# Altium PCB PCB_Connector_Board_4_2021-09-09.pcbdoc
Units mm, origin at the board's own origin, x right, y up, seen from the top; angles counter-clockwise.
Board outline 102.74 x 64.99 mm, 2 copper layers (Top Layer, Bottom Layer); 12 components, 22 nets, 47 pads, 8 vias.
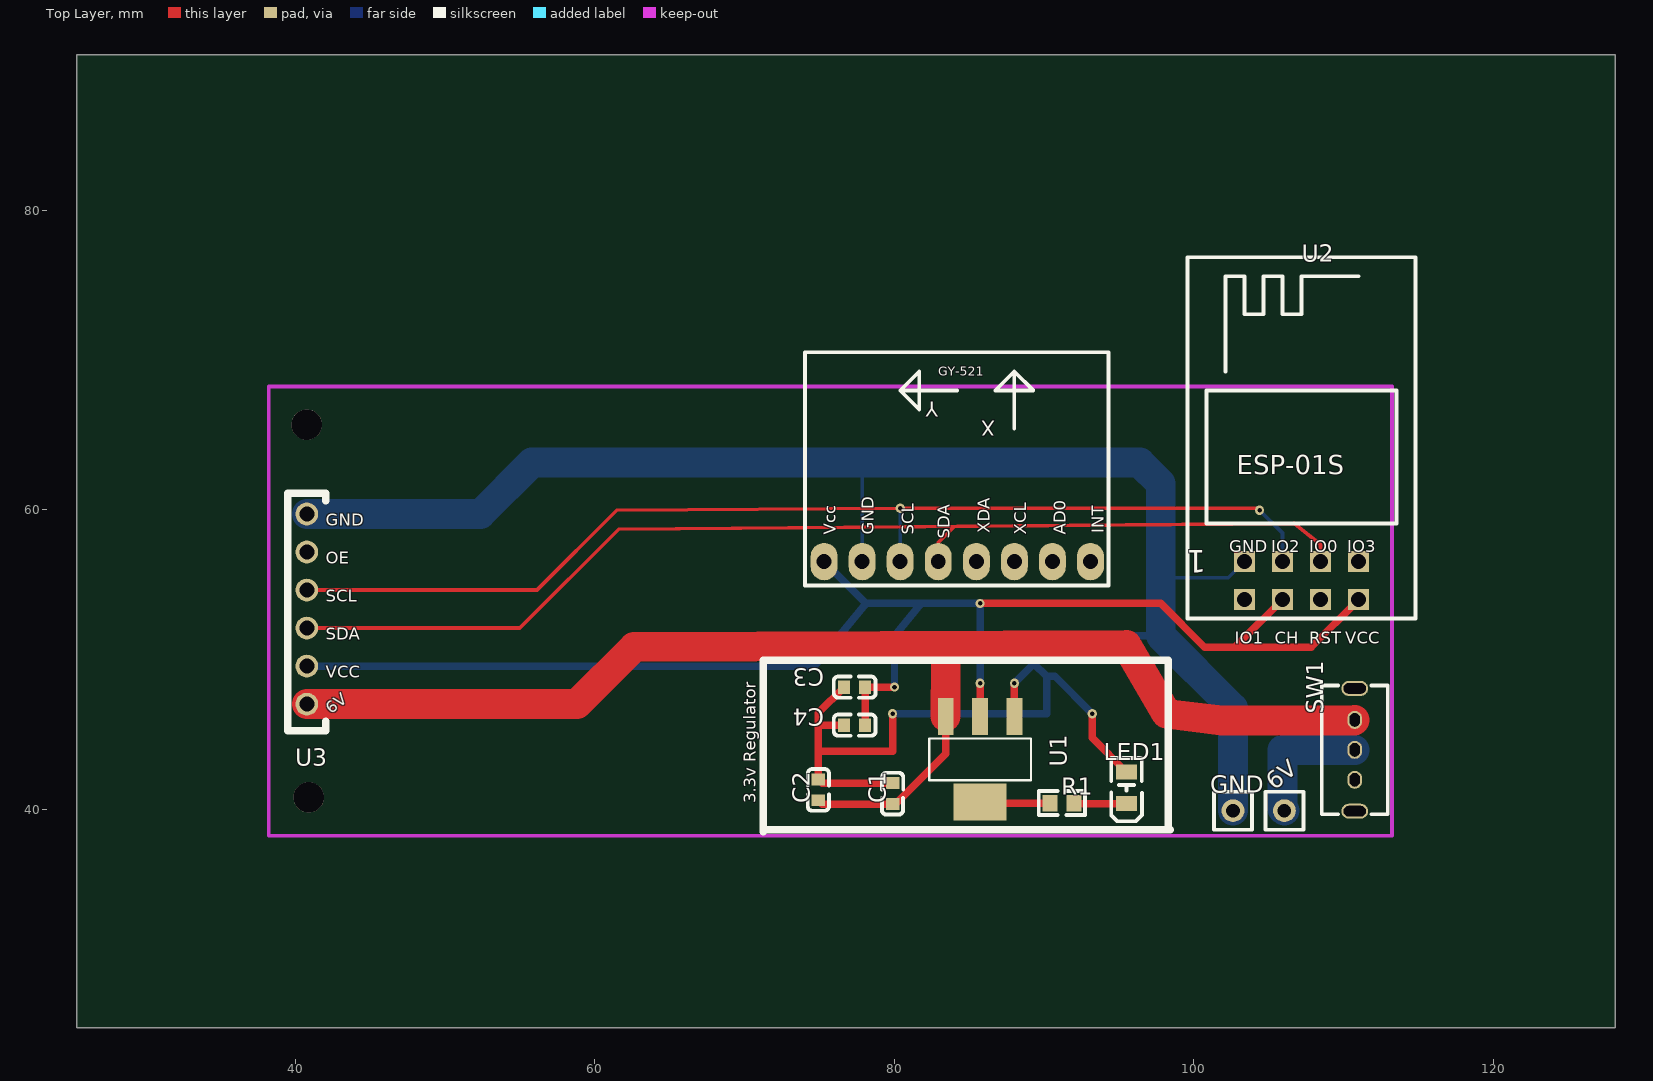
[diagram p0: Top Layer view]
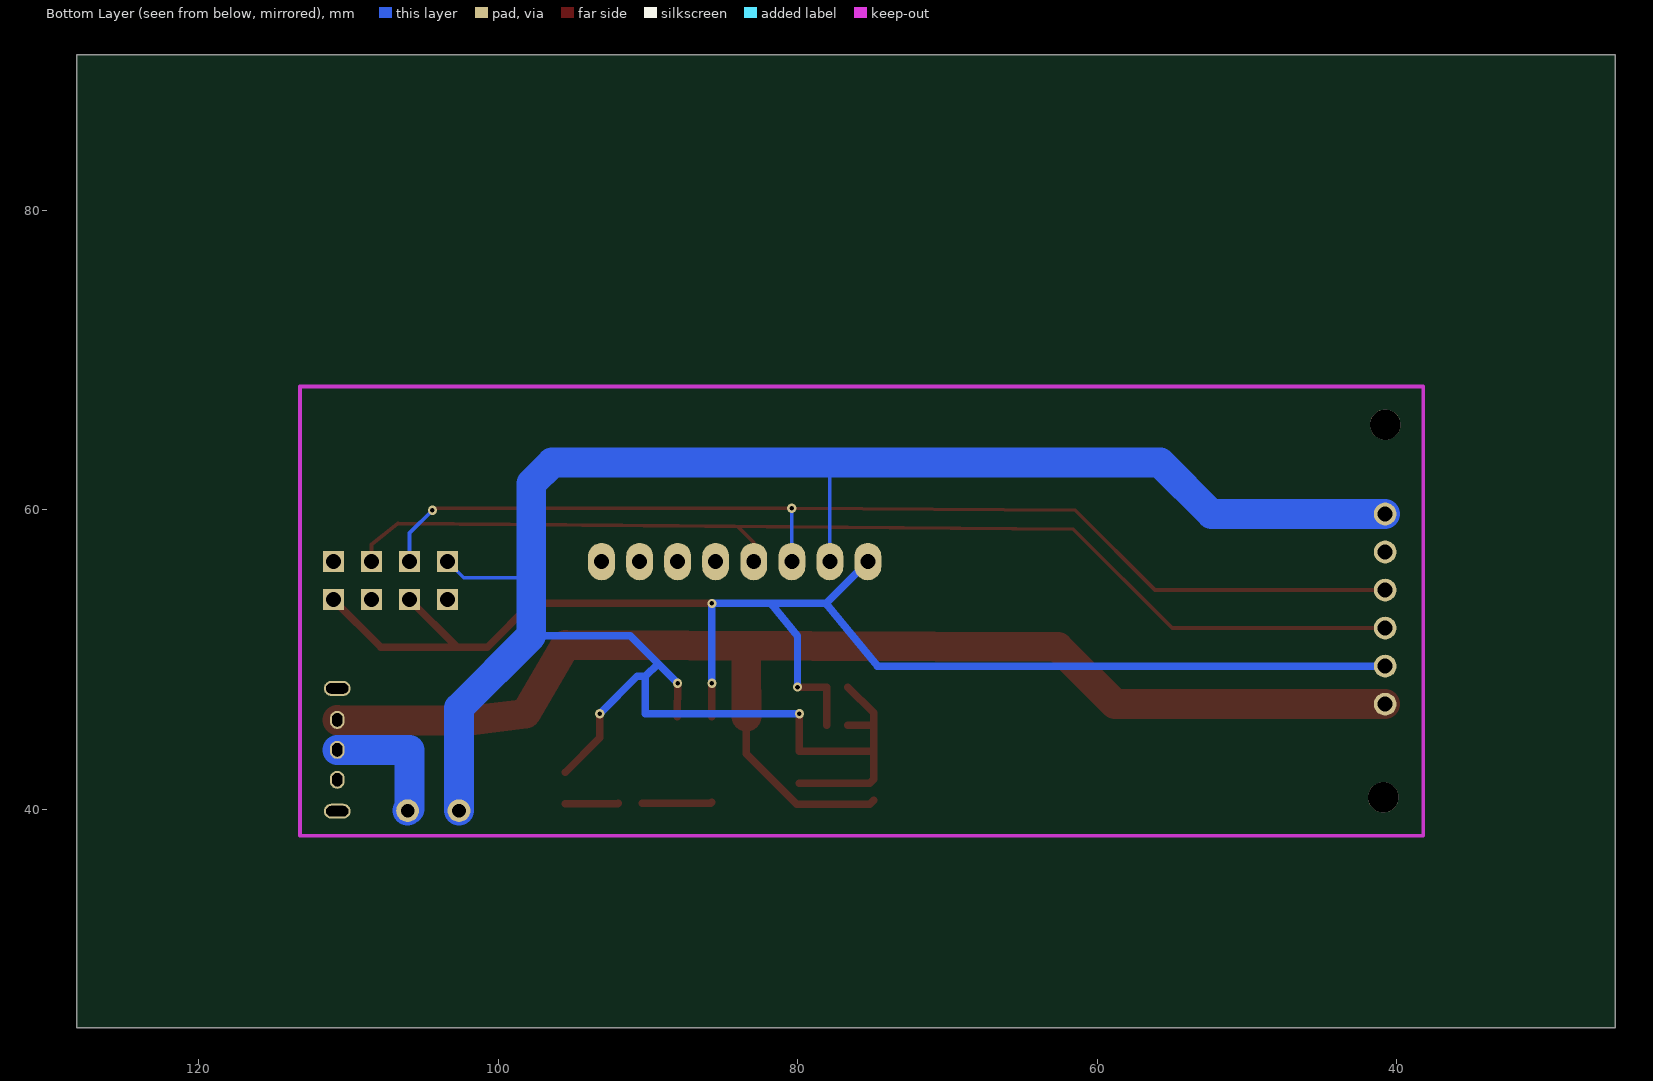
[diagram p1: Bottom Layer view, seen from below]

## Layer stack, top to bottom
Top Layer: signal copper (thickness not stored)
Dielectric: dielectric 0.32, FR-4, Dk 4.8
Bottom Layer: signal copper (thickness not stored)

## Board outline
128.143,25.4 25.4,25.4 25.4,90.388 128.143,90.388

## Components (designator, comment, footprint, x,y, rotation, side; value= is the part's Value field where it differs from the comment)
6V "6V Header" "SINGLE PIN HEADER" 106.045,39.906 r0 top
C1 "100u" C0603 79.883,41.049 r90 top
C2 "22u" C0603 74.93,41.303 r90 top
C3 "100u" C0603 77.343,48.161 r180 top
C4 "22u" C0603 77.343,45.621 r180 top
GND "GND Header" "SINGLE PIN HEADER" 102.616,39.906 r0 top
LED1 "LED0805-R-RD" LED0805-R-RD 95.504,41.43 r90 top
R1 "R0603" R0603 91.186,40.414 r0 top
SW1 "SK-12D02-VG5" SW-TH_SK-12D02VG3 110.744,43.97 r90 top
U1 "AMS1117-3.3_C165482" SOT-223_L6.5-W3.5-P2.30-LS7.0-BR 85.725,43.335 r90 top
U2 "ESP-01S" ESP-01S 107.188,55.273 r0 top
U3 "Header PWM Board" "6 PIN HEADER" 40.767,47.018 r90 top

## Footprints (in the part's own frame and the unit in brackets; to place one, negate y for a bottom-side part, rotate by r counter-clockwise, add the part's x,y. Pads: shape width x height; smd on the part's side, far side on the other; paste and mask are expansions set on the pad)
"6 PIN HEADER" [mil]
  round 60 hole 39.37: 1(0,0) 2(100,0) 3(200,0) 4(300,0) 5(400,0) 6(500,0)
C0603 [mm]
  rect 0.8x0.9 smd: 1(-0.7,0) 2(0.7,0)
  silkscreen extent -1.41,-0.71 1.39,0.72
ESP-01S [mm]
  rect 1.4x1.4 hole 1: 1(-3.81,1.27) 2(-1.27,1.27) 3(1.27,1.27) 4(3.81,1.27) 5(3.81,-1.27) 6(1.27,-1.27) 7(-1.27,-1.27) 8(-3.81,-1.27)
  silkscreen extent -7.62,-2.54 7.62,21.59
LED0805-R-RD [mm]
  rect 1x1.4 smd: 1(1.05,0) 2(-1.05,0)
  silkscreen extent -2.22,-1.04 1.99,1.01
R0603 [mm]
  rect 1x1.1 smd: 1(-0.8,0) 2(0.8,0)
  silkscreen extent -1.55,-0.8 1.55,0.81
"SINGLE PIN HEADER" [mil]
  round 60 hole 36: 1(0,0)
  silkscreen extent -50,-50 50,50
SOT-223_L6.5-W3.5-P2.30-LS7.0-BR [mm]
  rect 2.465x1.05 smd: 1(2.857,-2.3) 2(2.857,0) 3(2.857,2.3)
  rect 2.465x3.54 smd: 4(-2.857,0)
  silkscreen extent -1.4,-3.4 1.4,3.4
SW-TH_SK-12D02VG3 [mm]
  oval 1.2x1 hole 0.7 slot 0.9 at 0 deg: 1(-2,0) 2(0,0) 3(2,0)
  oval 1x1.8 hole 0.7 slot 1.5 at 90 deg: 4(4.1,0) 5(-4.1,0)
  silkscreen extent -4.3,-2.2 4.3,2.2

## Free pads (board coordinates)
  oval 1.8x2.5 hole 1: 1(75.311,56.543) 2(77.851,56.543) 3(80.391,56.543) 4(82.931,56.543) 5(85.471,56.543) 6(88.011,56.543) 7(90.551,56.543) 8(93.091,56.543)
  round 2.032 hole 2.032 unplated: ""(40.767,65.687) ""(40.894,40.795)

## Via types
v1: diameter 0.61, hole 0.305, Top Layer to Bottom Layer, 8 vias

## Nets (pads, with @x,y where several pads share a name; then routed paths per layer and width w, separated by ;. In a path a pad name is that pad's centre, name@x,y a point inside that pad or via, vN(x,y) a via of type N, cw(c..) or ccw(c..) an arc to the next point about the centre after c; other vN are vias at no path point)
N$3546: LED1.2 R1.2 | length 3.5
  Top Layer w0.5: R1.2 92.02,40.38 LED1.2
S$706: 
S$708: 
S$3600: 
SW1_1: SW1.1
SW1_2: 6V.1 SW1.2 | length 8.9
  Bottom Layer w2: 6V.1 105.918,40.033 105.918,43.97 SW1.2
SW1_4: SW1.4
SW1_5: SW1.5
U1_1: C1.2 C2.2 C3.2 C4.2 GND.1 LED1.1 pad.2 U1.1 U2.1 U3.6 | length 152.7
  Top Layer w0.5: 74.93,43.83 74.966,43.867 79.883,43.867 v1(79.883,46.383) ; 74.93,45.626 C4.2 ; C3.2 74.93,46.448 C2.2 75.184,41.749 C1.2 ; v1(88.011,48.415) U1.1 ; v1(93.218,46.383) 93.218,44.766 LED1.1
  Bottom Layer w0.254: pad.2 77.851,63.02 ; 97.79,55.461 102.296,55.461 U2.1
  Bottom Layer w0.5: v1(79.883,46.383) 90.17,46.383 90.17,48.875 ; v1(88.011,48.415) 91.186,51.59 97.79,51.59 ; 89.321,49.725 90.17,48.875 ; v1(93.218,46.383) 90.726,48.875 90.17,48.875
  Bottom Layer w2: U3.6 52.36,59.718 55.789,63.147 96.393,63.147 97.79,61.75 97.79,51.59 102.616,46.764 GND.1
U1_2: C3.1 C4.1 pad.1 U1.2 U2.5 U2.7 U3.2 | length 105.5
  Top Layer w0.5: C4.1 C3.1 v1(80.01,48.161) ; U1.2 v1(85.725,48.415) ; v1(85.725,53.749) 97.79,53.749 100.711,50.828 102.743,50.828 U2.7 ; 102.235,50.828 107.823,50.828 U2.5
  Bottom Layer w0.5: U3.2 74.676,49.558 78.105,53.749 ; pad.1 78.105,53.749 ; v1(80.01,48.161) 80.01,51.577 81.788,53.749 ; 81.609,53.749 78.105,53.749 ; v1(85.725,48.415) v1(85.725,53.749) 78.105,53.749
U1_3: C1.1 C2.1 SW1.3 U1.3 U3.1 | length 90.3
  Top Layer w0.5: C2.1 75.184,40.349 C1.1 80.072,40.349 83.425,43.702 U1.3
  Top Layer w2: U3.1 58.801,47.018 62.611,50.828 95.504,50.955 98.171,46.383 101.854,45.934 110.709,45.934 SW1.3 ; U1.3 83.434,49.812
U1_4: R1.1 U1.4 | length 4.7
  Top Layer w0.5: U1.4 85.788,40.414 R1.1
U2_2: pad.3 U2.2 U3.4 | length 73.5
  Top Layer w0.254: U3.4 56.134,54.638 61.468,59.972 v1(80.391,60.099) 104.267,60.099 v1(104.394,59.972)
  Bottom Layer w0.254: pad.3 v1(80.391,60.099) ; v1(104.394,59.972) 105.918,58.448 U2.2
U2_3: pad.4 U2.3 U3.3 | length 74.8
  Top Layer w0.254: U3.3 54.991,52.098 61.595,58.702 106.693,59.083 108.458,57.686 U2.3 ; pad.4 82.931,57.813 83.947,58.829
U2_4: U2.4
U2_6: U2.6
U2_8: U2.8
U3_5: U3.5
U6_5: pad.5
U6_6: pad.6
U6_7: pad.7
U6_8: pad.8

## Silkscreen, mask and mechanical layers (free items; w line width, h text height)
Top Overlay:
  lines w0.254: 80.391,67.973 84.201,67.973 80.391,67.973 ; 80.391,67.973 81.661,69.243 81.661,66.703 80.391,67.973 ; 88.011,69.243 88.011,65.433 88.011,69.243 ; 88.011,69.243 86.741,67.973 89.281,67.973 88.011,69.243 ; 74.041,54.953 94.301,54.953 94.301,70.513 74.041,70.513 74.041,54.953
  lines w0.5 net S$3600: 71.247,38.509 71.247,49.939 98.298,49.939 98.298,38.763 98.425,38.636 71.374,38.636 71.247,38.509
  lines w0.5 net S$706: 39.497,61.115 39.497,45.24 42.037,45.24 42.037,45.875
  lines w0.5 net S$708: 39.497,61.115 42.037,61.115 42.037,60.607
  text "GY-521" at 82.931,68.943 h0.6
  text "Y" at 82.931,67.203 h1 r180
  text "X" at 86.741,65.933 h1 r180
  text "GND" at 42.037,58.937 h0.8
  text "XDA" at 86.379,58.448 h0.8 r90
  text "INT" at 93.999,58.448 h0.8 r90
  text "Vcc" at 76.092,58.321 h0.8 r90
  text "GND" at 78.632,58.321 h0.8 r90
  text "SCL" at 81.299,58.321 h0.8 r90
  text "XCL" at 88.792,58.321 h0.8 r90
  text "AD0" at 91.459,58.321 h0.8 r90
  text "SDA" at 83.712,58.067 h0.8 r90
  text "GND" at 102.362,57.159 h0.8
  text "IO2" at 105.156,57.159 h0.8
  text "IO0" at 107.696,57.159 h0.8
  text "IO3" at 110.236,57.159 h0.8
  text "OE" at 42.037,56.397 h0.8
  text "SCL" at 42.037,53.857 h0.8
  text "SDA" at 42.037,51.317 h0.8
  text "IO1" at 102.743,51.063 h0.8
  text "CH" at 105.41,51.063 h0.8
  text "RST" at 107.696,51.063 h0.8
  text "VCC" at 110.109,51.063 h0.8
  text "VCC" at 42.037,48.777 h0.8
  text "6V" at 42.41,46.322 h0.8 r38
  text "3.3v Regulator" at 70.758,40.414 h0.8 r90
Document:
  text "Component side" at 78.359,62.012 h1

## Text inside footprints (layer, text, board x,y; h text height)
U2: Top Overlay "1" at 100.838,57.293 h1.5 r180